# Altium PCB LED Oscilloscope.PcbDoc
Units mm, origin at the board's own origin, x right, y up, seen from the top; angles counter-clockwise.
Board outline 120 x 90 mm, 2 copper layers (Top Layer, Bottom Layer); 122 components, 33 nets, 286 pads, 0 vias.
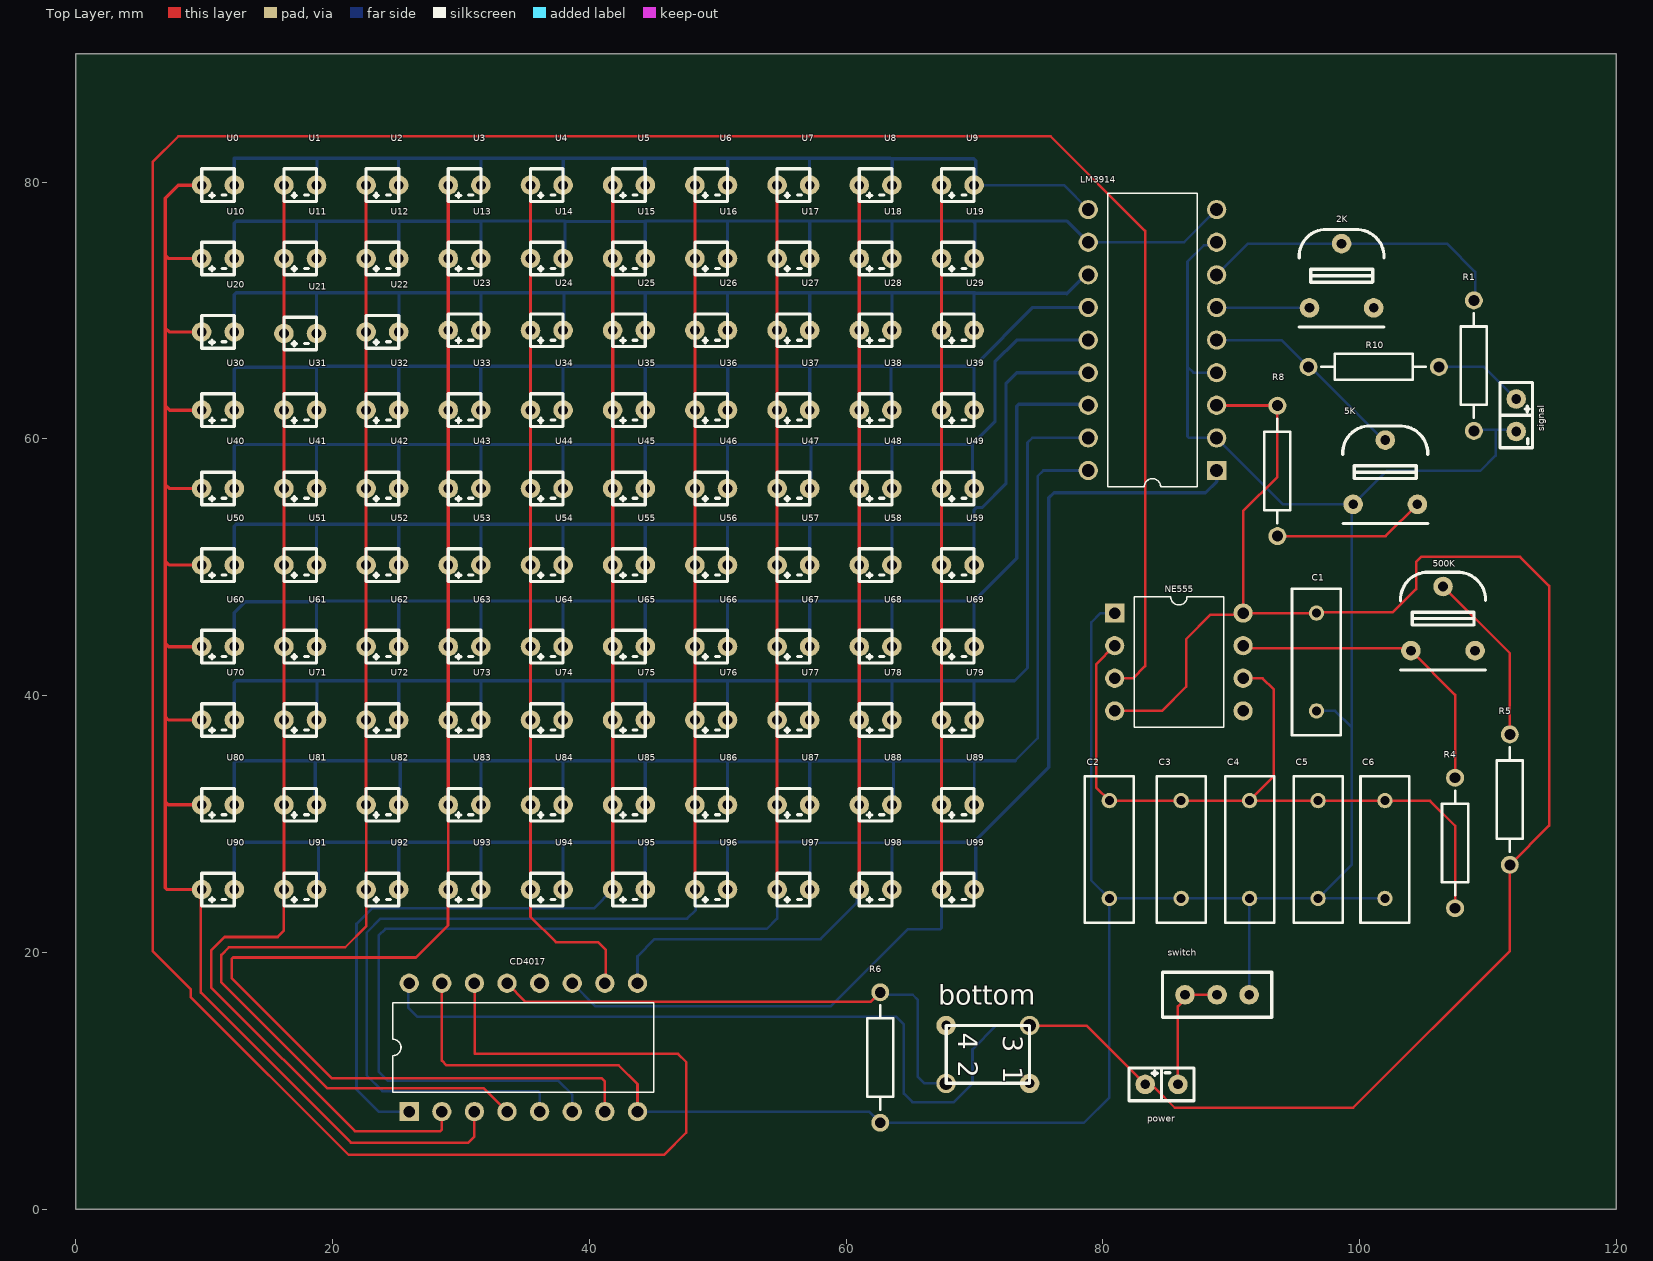
[diagram p0: Top Layer view]
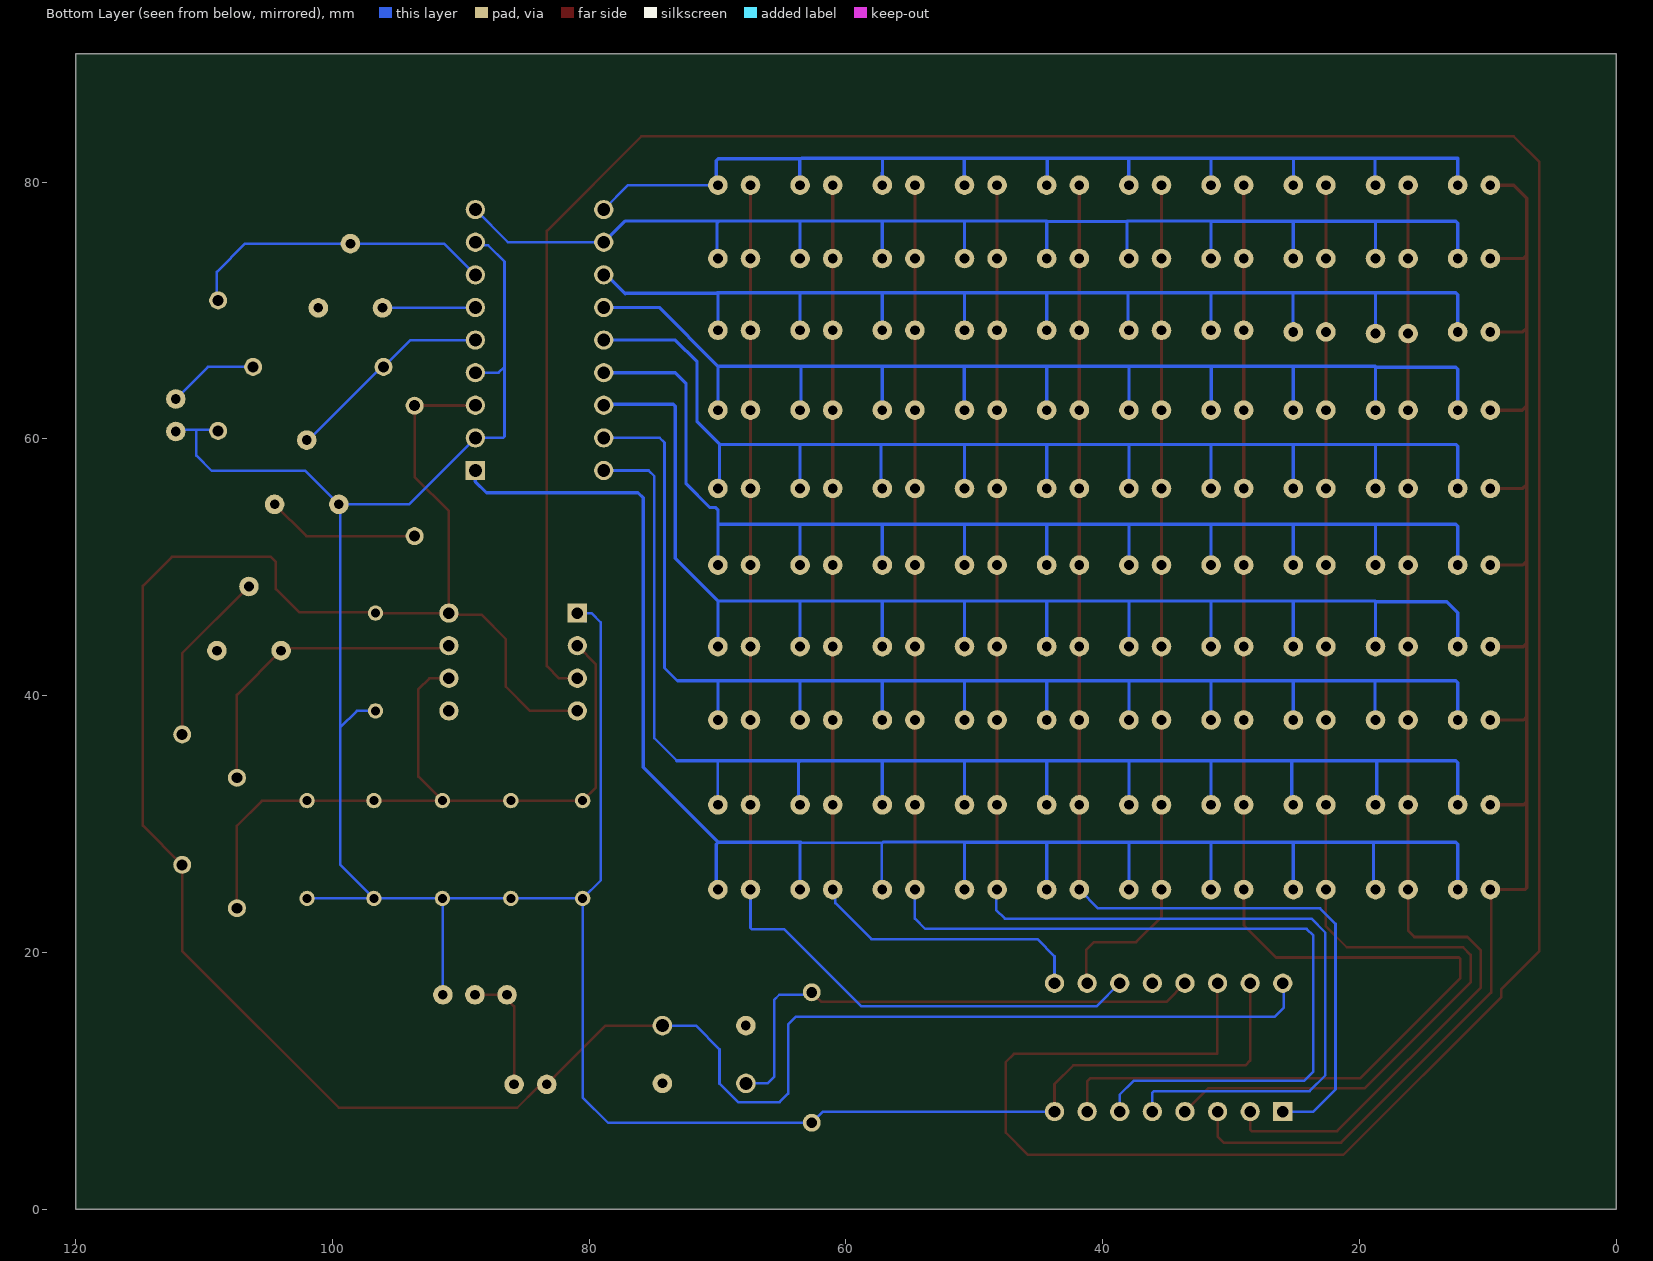
[diagram p1: Bottom Layer view, seen from below]

## Layer stack, top to bottom
Top Solder: solder mask 0.0102, Solder Resist, Dk 3.5
Top Layer: signal copper 0.0356
Dielectric 1: dielectric 0.32, FR-4, Dk 4.8
Bottom Layer: signal copper 0.0356
Bottom Solder: solder mask 0.0102, Solder Resist, Dk 3.5

## Board outline
0,0 0,90 120,90 120,0

## Design rules (kind name [scope] priority, off if disabled: settings)
Clearance [All] p1: gap=0.6 ignorepadtopadclearanceinfootprint=FALSE
PolygonConnect [All] p1: connectstyle=Direct reliefconductorwidth=0.254 reliefentries=4 polygonreliefangle="90 Angle" airgapwidth=0.254
RoomDefinition "LED Oscilloscope" [InComponentClass('LED Oscilloscope')] p1: confinementstyle=ConfineIn formatcopy=TRUE lockcomponents=FALSE outline -25.4,-25.4 25.4,-25.4 25.4,0 -25.4,0
RoutingVias [All] p1: holewidth=1 width=1.5 viastyle="Through Hole" minholewidth=1 minwidth=1.5 maxholewidth=1 maxwidth=1.5
SolderMaskExpansion [All] p1: expansion=0.102 istentingtop=FALSE
Width [All] p1: maxlimit=0.254 minlimit=0.2 preferedwidth=0.2
30 further rules are at their usual default settings.

## Components (designator, comment, footprint, x,y, rotation, side; value= is the part's Value field where it differs from the comment)
2K "RESADJ" RESADJ 96.1,70.2 r0 top
5K "RESADJ" RESADJ 99.5,54.9 r0 top
500K "RESADJ" RESADJ 104,43.5 r0 top
bottom "bottom" BOTTOM 74.3,14.3 r270 top
C1 "Cap" RAD-0.3 96.642,42.618 r90 top value=10nF
C2 "Cap" RAD-0.3 80.513,28.013 r90 top value=10nF
C3 "Cap" RAD-0.3 86.101,28.013 r90 top value=10nF
C4 "Cap" RAD-0.3 91.435,28.013 r90 top value=10nF
C5 "Cap" RAD-0.3 96.769,28.013 r90 top value=10nF
C6 "Cap" RAD-0.3 101.976,28.013 r90 top value=10nF
CD4017 "CD4017" CD4017 25.98,7.6 r90 top
LM3914 "LM3914" LM3914 88.867,57.531 r180 top
NE555 "NE555" "NE555 - DUPLICATE" 80.927,46.428 r0 top
power "power" POWER 83.307,9.725 r0 top
R1 "Res2" AXIAL-0.4 108.9,65.7 r270 top value=1K
R4 "Res2" AXIAL-0.4 107.437,28.521 r270 top value=1K
R5 "Res2" AXIAL-0.4 111.7,31.9 r90 top value=120R
R6 "Res2" AXIAL-0.4 62.667,11.811 r90 top value=10K
R8 "Res2" AXIAL-0.4 93.6,57.5 r270 top value=15K
R10 "Res2" AXIAL-0.4 101.1,65.6 r0 top value=10K
signal "signal" SIGNAL 112.2,60.57 r270 top
switch "switch" SWITCH 86.4,16.7 r0 top
U0 "diode" LED 12.357,79.756 r0 top
U1 "diode" LED 18.759,79.756 r0 top
U2 "diode" LED 25.162,79.756 r0 top
U3 "diode" LED 31.564,79.756 r0 top
U4 "diode" LED 37.966,79.756 r0 top
U5 "diode" LED 44.368,79.756 r0 top
U6 "diode" LED 50.77,79.756 r0 top
U7 "diode" LED 57.173,79.756 r0 top
U8 "diode" LED 63.575,79.756 r0 top
U9 "diode" LED 69.977,79.756 r0 top
U10 "diode" LED 12.357,74.041 r0 top
U11 "diode" LED 18.759,74.041 r0 top
U12 "diode" LED 25.162,74.041 r0 top
U13 "diode" LED 31.564,74.041 r0 top
U14 "diode" LED 37.966,74.041 r0 top
U15 "diode" LED 44.368,74.041 r0 top
U16 "diode" LED 50.77,74.041 r0 top
U17 "diode" LED 57.173,74.041 r0 top
U18 "diode" LED 63.575,74.041 r0 top
U19 "diode" LED 69.977,74.041 r0 top
U20 "diode" LED 12.357,68.326 r0 top
U21 "diode" LED 18.759,68.199 r0 top
U22 "diode" LED 25.162,68.326 r0 top
U23 "diode" LED 31.564,68.453 r0 top
U24 "diode" LED 37.966,68.453 r0 top
U25 "diode" LED 44.368,68.453 r0 top
U26 "diode" LED 50.77,68.453 r0 top
U27 "diode" LED 57.173,68.453 r0 top
U28 "diode" LED 63.575,68.453 r0 top
U29 "diode" LED 69.977,68.453 r0 top
U30 "diode" LED 12.357,62.23 r0 top
U31 "diode" LED 18.759,62.23 r0 top
U32 "diode" LED 25.162,62.23 r0 top
U33 "diode" LED 31.564,62.23 r0 top
U34 "diode" LED 37.966,62.23 r0 top
U35 "diode" LED 44.368,62.23 r0 top
U36 "diode" LED 50.77,62.23 r0 top
U37 "diode" LED 57.173,62.23 r0 top
U38 "diode" LED 63.575,62.23 r0 top
U39 "diode" LED 69.977,62.23 r0 top
U40 "diode" LED 12.357,56.134 r0 top
U41 "diode" LED 18.759,56.134 r0 top
U42 "diode" LED 25.162,56.134 r0 top
U43 "diode" LED 31.564,56.134 r0 top
U44 "diode" LED 37.966,56.134 r0 top
U45 "diode" LED 44.368,56.134 r0 top
U46 "diode" LED 50.77,56.134 r0 top
U47 "diode" LED 57.173,56.134 r0 top
U48 "diode" LED 63.575,56.134 r0 top
U49 "diode" LED 69.977,56.134 r0 top
U50 "diode" LED 12.357,50.165 r0 top
U51 "diode" LED 18.759,50.165 r0 top
U52 "diode" LED 25.162,50.165 r0 top
U53 "diode" LED 31.564,50.165 r0 top
U54 "diode" LED 37.966,50.165 r0 top
U55 "diode" LED 44.368,50.165 r0 top
U56 "diode" LED 50.77,50.165 r0 top
U57 "diode" LED 57.173,50.165 r0 top
U58 "diode" LED 63.575,50.165 r0 top
U59 "diode" LED 69.977,50.165 r0 top
U60 "diode" LED 12.357,43.815 r0 top
U61 "diode" LED 18.759,43.815 r0 top
U62 "diode" LED 25.162,43.815 r0 top
U63 "diode" LED 31.564,43.815 r0 top
U64 "diode" LED 37.966,43.815 r0 top
U65 "diode" LED 44.368,43.815 r0 top
U66 "diode" LED 50.77,43.815 r0 top
U67 "diode" LED 57.173,43.815 r0 top
U68 "diode" LED 63.575,43.815 r0 top
U69 "diode" LED 69.977,43.815 r0 top
U70 "diode" LED 12.357,38.1 r0 top
U71 "diode" LED 18.759,38.1 r0 top
U72 "diode" LED 25.162,38.1 r0 top
U73 "diode" LED 31.564,38.1 r0 top
U74 "diode" LED 37.966,38.1 r0 top
U75 "diode" LED 44.368,38.1 r0 top
U76 "diode" LED 50.77,38.1 r0 top
U77 "diode" LED 57.173,38.1 r0 top
U78 "diode" LED 63.575,38.1 r0 top
U79 "diode" LED 69.977,38.1 r0 top
U80 "diode" LED 12.357,31.496 r0 top
U81 "diode" LED 18.759,31.496 r0 top
U82 "diode" LED 25.162,31.496 r0 top
U83 "diode" LED 31.564,31.496 r0 top
U84 "diode" LED 37.966,31.496 r0 top
U85 "diode" LED 44.368,31.496 r0 top
U86 "diode" LED 50.77,31.496 r0 top
U87 "diode" LED 57.173,31.496 r0 top
U88 "diode" LED 63.575,31.496 r0 top
U89 "diode" LED 69.977,31.496 r0 top
U90 "diode" LED 12.357,24.892 r0 top
U91 "diode" LED 18.759,24.892 r0 top
U92 "diode" LED 25.162,24.892 r0 top
U93 "diode" LED 31.564,24.892 r0 top
U94 "diode" LED 37.966,24.892 r0 top
U95 "diode" LED 44.368,24.892 r0 top
U96 "diode" LED 50.77,24.892 r0 top
U97 "diode" LED 57.173,24.892 r0 top
U98 "diode" LED 63.575,24.892 r0 top
U99 "diode" LED 69.977,24.892 r0 top

## Footprints (in the part's own frame and the unit in brackets; to place one, negate y for a bottom-side part, rotate by r counter-clockwise, add the part's x,y. Pads: shape width x height; smd on the part's side, far side on the other; paste and mask are expansions set on the pad)
AXIAL-0.4 [mm] "Axial Device, Thru-Hole; 2 Leads; 0.4 in Pin Spacing"
  round 1.4 hole 0.85: 1(-5.08,0) 2(5.08,0)
  silkscreen extent -4.06,-1.02 4.06,1.02
BOTTOM [mil]
  round 60 hole 39.37: 1(0,0) 2(177.17,-255.9)
  round 60 hole 30: 28(177.17,0) 29(0,-255.9)
  silkscreen extent 0,-256 177,0
CD4017 [mm]
  rect 1.5x1.5 hole 0.9: 1(0,0)
  round 1.5 hole 0.9: 2(0,-2.54) 3(0,-5.08) 4(0,-7.62) 5(0,-10.16) 6(0,-12.7) 7(0,-15.24) 8(0,-17.78) 9(10,-17.78) 10(10,-15.24) 11(10,-12.7) 12(10,-10.16) 13(10,-7.62) 14(10,-5.08) 15(10,-2.54) 16(10,0)
  silkscreen extent 1.51,-19.05 8.49,1.27
LED [mil]
  round 60 hole 30: 0(-100,0) 1(0,0)
  silkscreen extent -100,-50 0,50
LM3914 [mm]
  rect 1.5x1.5 hole 1: 1(0,0)
  round 1.5 hole 1: 2(0,-2.54) 3(0,-5.08) 4(0,-7.62) 5(0,-10.16) 6(0,-12.7) 7(0,-15.24) 8(0,-17.78) 9(0,-20.32) 10(10,-20.32) 11(10,-17.78) 12(10,-15.24) 13(10,-12.7) 14(10,-10.16) 15(10,-7.62) 16(10,-5.08) 17(10,-2.54) 18(10,0)
  silkscreen extent 1.51,-21.59 8.49,1.27
"NE555 - DUPLICATE" [mm]
  rect 1.5x1.5 hole 0.9: 1(0,0)
  round 1.5 hole 0.9: 2(0,-2.54) 3(0,-5.08) 4(0,-7.62) 5(10,-7.62) 6(10,-5.08) 7(10,-2.54) 8(10,0)
  silkscreen extent 1.51,-8.89 8.49,1.27
POWER [mil]
  round 60 hole 30: 8(0,0) 9(100,0)
  silkscreen extent -50,-50 150,50
RAD-0.3 [mm] "Radial Cap, Thru-Hole; 2 Leads; 0.3 in Pin Spacing"
  round 1.2 hole 0.7: 1(-3.81,0) 2(3.81,0)
  silkscreen extent -5.71,-1.91 5.71,1.9
RESADJ [mil]
  round 60 hole 30: 1(0,0) 2(196.85,0) 3(98.43,196.85)
  silkscreen extent -32,-59 229,240
SIGNAL [mil]
  round 60 hole 30: 6(0,0) 7(-99.61,0)
  silkscreen extent -150,-50 50,50
SWITCH [mil]
  round 60 hole 30: 10(0,0) 11(98.43,0) 12(196.85,0)
  silkscreen extent -69,-69 266,69

## Part data
C1 C2 C3 C4 C5 C6: "Capacitor", LatestRevisionDate=17-Jul-2002, LatestRevisionNote="Re-released for DXP Platform.", PackageDescription="Radial Cap, Thru-Hole; 2 Leads; 0.3 in Pin Spacing", PackageReference=RAD-0.3, Published=8-Jun-2000, Publisher="Altium Limited"
R1 R4 R5 R6 R8 R10: "Resistor", LatestRevisionDate=17-Jul-2002, LatestRevisionNote="Re-released for DXP Platform.", PackageDescription="Axial Device, Thru-Hole; 2 Leads; 0.4 in Pin Spacing", PackageReference=AXIAL-0.4, Published=8-Jun-2000, Publisher="Altium Limited"
U0 U1 U2 U3 U4 U5 U6 U7 U8 U9 U10 U11 U12 U13 U14 U15 U16 U17 U18 U19 U20 U21 U22 U23 U24 U25 U26 U27 U28 U29 U30 U31 U32 U33 U34 U35 U36 U37 U38 U39 U40 U41 U42 U43 U44 U45 U46 U47 U48 U49 U50 U51 U52 U53 U54 U55 U56 U57 U58 U59 U60 U61 U62 U63 U64 U65 U66 U67 U68 U69 U70 U71 U72 U73 U74 U75 U76 U77 U78 U79 U80 U81 U82 U83 U84 U85 U86 U87 U88 U89 U90 U91 U92 U93 U94 U95 U96 U97 U98 U99: "own use"

## Nets (pads, with @x,y where several pads share a name; then routed paths per layer and width w, separated by ;. In a path a pad name is that pad's centre, name@x,y a point inside that pad or via, vN(x,y) a via of type N, cw(c..) or ccw(c..) an arc to the next point about the centre after c; other vN are vias at no path point)
GND: 5K.1 C1.1 C2.1 C3.1 C4.1 C5.1 C6.1 CD4017.8 CD4017.15 LM3914.2 LM3914.4 LM3914.8 NE555.1 R1.2 R6.1 signal.6 switch.12 | length 219.2
  Top Layer w0.2: CD4017.15 28.52,11.58 28.9,11.2 42.3,11.2 43.76,9.74 CD4017.8 CD4017.8@43.65,7.71 ; C2.1 C2.1@80.6,24.116
  Bottom Layer w0.2: CD4017.8 61.798,7.6 R6.1 78.531,6.731 80.513,8.713 C2.1 ; NE555.1@80.277,45.778 NE555.1 79.828,46.428 79.1,45.7 79.1,25.616 C2.1 ; LM3914.4 87.049,65.151 86.6,65.6 ; LM3914.8 88.618,75.062 87.862,75.062 86.6,73.8 86.6,65.6 ; switch.12 91.418,16.717 91.418,24.185 C4.1 ; C1.1 98.092,38.808 99.4,37.5 ; C6.1 C5.1 ; R1.2 108.98,60.7 110.6,60.7 ; signal.6 112.07,60.7 110.6,60.7 ; C2.1 C3.1 C4.1 ; 86.6,65.6 86.6,60.188 86.717,60.071 LM3914.2 94.038,54.9 99.4,54.9 5K.1 ; C4.1 C5.1 ; C5.1 99.4,26.834 99.4,37.5 ; 99.4,37.5 99.4,54.8 5K.1 ; 5K.1 102.1,57.5 109.4,57.5 110.6,58.7 110.6,60.7
Net2K_1: 2K.1 LM3914.6 | length 7.2
  Bottom Layer w0.2: LM3914.6 88.882,70.216 96.084,70.216 2K.1
Net2K_3: 2K.3 LM3914.7 R1.1 | length 24.3
  Bottom Layer w0.2: LM3914.7 91.296,75.2 2K.3 106.8,75.2 109,73 109,70.88 R1.1
Net5K_2: 5K.2 R8.2 | length 11.9
  Top Layer w0.2: R8.2 102.02,52.42 5K.2
Net5K_3: 5K.3 LM3914.5 R10.1 | length 16.4
  Bottom Layer w0.2: LM3914.5 93.929,67.691 R10.1 96.16,65.6 101.86,59.9 5K.3
Net500K_1: 500K.1 NE555.7 R4.1 | length 24.6
  Top Layer w0.2: NE555.7 91.121,43.694 103.806,43.694 500K.1 107.437,40.063 R4.1
Net500K_3: 500K.3 R5.2 | length 13.7
  Top Layer w0.2: 500K.3 111.7,43.3 R5.2
Netbottom_2: bottom.2 CD4017.13 R6.2 | length 41.8
  Top Layer w0.2: CD4017.13 35.05,16.15 61.926,16.15 R6.2 ; bottom.2@67.638,9.962 bottom.2
  Bottom Layer w0.2: R6.2 62.858,16.7 65.2,16.7 65.6,16.3 65.6,10.3 66.1,9.8 bottom.2
  Bottom Layer w0.254: R6.2 R6.2@62.709,16.891
NetC2_2: C2.2 C3.2 C4.2 C5.2 C6.2 NE555.2 NE555.6 R4.2 | length 59.4
  Top Layer w0.2: NE555.2 79.477,42.438 79.477,32.859 C2.2 C3.2 C4.2 ; NE555.6 92.452,41.348 93.3,40.5 93.3,33.688 C4.2 ; R4.2 107.437,29.863 105.5,31.8 101.999,31.8 C6.2 C5.2 C4.2
NetCD4017_1: CD4017.1 U5.0 U15.0 U25.0 U35.0 U45.0 U55.0 U65.0 U75.0 U85.0 U95.0 | length 93.7
  Top Layer w0.254: U95.0 U85.0 U65.0 U45.0 U25.0 U5.0
  Bottom Layer w0.2: CD4017.1 24.482,7.6 24.465,7.583 23.617,7.583 21.873,9.327 21.873,22.227 23.076,23.43 40.366,23.43 U95.0
NetCD4017_2: CD4017.2 U1.0 U11.0 U21.0 U31.0 U41.0 U51.0 U61.0 U71.0 U81.0 U91.0 | length 91.3
  Top Layer w0.2: U91.0 16.219,21.693 15.726,21.2 11.611,21.2 10.557,20.146 10.557,17.274 21.748,6.082 28.403,6.082 28.52,6.199 CD4017.2
  Top Layer w0.254: U91.0 U81.0 U71.0 U61.0 U51.0 U41.0 U31.0 U21.0 U11.0 U1.0
NetCD4017_3: CD4017.3 U0.0 U10.0 U20.0 U30.0 U40.0 U50.0 U60.0 U70.0 U80.0 U90.0 | length 119.8
  Top Layer w0.2: U90.0 9.757,24.832 9.757,16.874 21.448,5.183 30.583,5.183 31.06,5.66 CD4017.3
  Top Layer w0.254: U90.0 7.134,24.892 6.985,25.041 6.985,31.73 ; U80.0 7.219,31.496 6.985,31.73 ; U70.0 7.226,38.1 6.985,38.341 ; U60.0 7.249,43.815 6.985,44.079 ; U50.0 7.303,50.165 6.985,50.483 ; U40.0 7.28,56.134 6.985,56.429 ; U30.0 7.338,62.23 6.985,62.583 ; U20.0 7.278,68.326 6.985,68.619 ; U10.0 7.239,74.041 6.985,74.295 ; U0.0 8.001,79.756 6.985,78.74 6.985,74.295 ; 6.985,31.73 6.985,38.341 ; 6.985,38.341 6.985,44.079 ; 6.985,44.079 6.985,50.483 ; 6.985,50.483 6.985,56.429 ; 6.985,56.429 6.985,62.583 ; 6.985,62.583 6.985,68.619 ; 6.985,68.619 6.985,74.295
NetCD4017_4: CD4017.4 U2.0 U12.0 U22.0 U32.0 U42.0 U52.0 U62.0 U72.0 U82.0 U92.0 | length 98.5
  Top Layer w0.2: U82.0 U92.0 22.622,22.022 21,20.4 11.943,20.4 11.357,19.814 11.357,17.66 19.612,9.404 31.796,9.404 CD4017.4
  Top Layer w0.254: U82.0 U72.0 U62.0 U52.0 U42.0 U32.0 U22.0 U12.0 U2.0
NetCD4017_5: CD4017.5 U6.0 U16.0 U26.0 U36.0 U46.0 U56.0 U66.0 U76.0 U86.0 U96.0 | length 109.5
  Top Layer w0.254: U96.0 U86.0 U76.0 U56.0 U36.0 U16.0 U6.0
  Bottom Layer w0.2: CD4017.5 36.14,9.083 36.023,9.2 23.9,9.2 22.673,10.427 22.673,21.543 23.757,22.627 47.627,22.627 48.3,23.3 48.3,24.822 U96.0
NetCD4017_6: CD4017.6 U7.0 U17.0 U27.0 U37.0 U47.0 U57.0 U67.0 U77.0 U87.0 U97.0 | length 116.4
  Top Layer w0.254: U97.0 U87.0 U77.0 U67.0 U57.0 U47.0 U37.0 U27.0 U17.0 U7.0
  Bottom Layer w0.2: CD4017.6 38.68,8.92 37.6,10 24.317,10 23.6,10.717 23.6,21.3 24.127,21.827 53.827,21.827 54.633,22.633 U97.0
NetCD4017_7: CD4017.7 U3.0 U13.0 U23.0 U33.0 U43.0 U53.0 U63.0 U73.0 U83.0 U93.0 | length 111.8
  Top Layer w0.2: U83.0 U93.0 29,24.868 29,22.1 26.5,19.6 12.274,19.6 12.157,19.483 12.157,17.991 19.944,10.204 40.964,10.204 41.22,9.949 CD4017.7
  Top Layer w0.254: U83.0 U73.0 U63.0 U53.0 U43.0 U33.0 U23.0 U13.0 U3.0
NetCD4017_9: CD4017.9 U8.0 U18.0 U28.0 U38.0 U48.0 U58.0 U68.0 U78.0 U88.0 U98.0 | length 77.1
  Top Layer w0.254: U8.0 U28.0 U48.0 U68.0 U88.0 U98.0 U98.0@61.214,24.713
  Bottom Layer w0.2: CD4017.9 43.76,19.687 45.1,21.027 58.027,21.027 60.83,23.83 60.83,24.687 U98.0
NetCD4017_10: CD4017.10 U4.0 U14.0 U24.0 U34.0 U44.0 U54.0 U64.0 U74.0 U84.0 U94.0 | length 65.7
  Top Layer w0.2: U94.0 35.426,22.774 37.4,20.8 40.7,20.8 41.3,20.2 41.3,17.68 CD4017.10 ; 35.426,25.719 U84.0 U74.0
  Top Layer w0.254: U74.0 U64.0 U54.0 U34.0 U14.0 U4.0
NetCD4017_11: CD4017.11 U9.0 U19.0 U29.0 U39.0 U49.0 U59.0 U69.0 U79.0 U89.0 U99.0 | length 89.9
  Top Layer w0.254: U99.0 U89.0 U79.0 U59.0 U39.0 U19.0 U9.0
  Bottom Layer w0.2: CD4017.11 40.48,15.8 58.8,15.8 64.8,21.8 67.32,21.8 67.437,21.917 U99.0@67.437,24.765
  Bottom Layer w0.254: U99.0 U99.0@67.564,24.765
NetCD4017_14: CD4017.14 NE555.3 | length 256.3
  Top Layer w0.2: CD4017.14 31.1,17.56 31.1,12.1 46.916,12.1 47.556,11.459 47.556,5.956 45.828,4.228 21.271,4.228 8.957,16.542 8.957,17.143 6,20.1 6,81.565 8.001,83.566 75.934,83.566 83.3,76.2 83.3,42.3 82.348,41.348 NE555.3
NetLM3914_1: LM3914.1 U90.1 U91.1 U92.1 U93.1 U94.1 U95.1 U96.1 U97.1 U98.1 U99.1 | length 138.2
  Bottom Layer w0.2: 50.8,28.575 50.825,28.6 57.083,28.6 57.137,28.545 ; U97.1 57.2,24.919 57.2,28.483 57.137,28.545 ; 63.5,28.575 63.47,28.545 57.137,28.545
  Bottom Layer w0.254: U90.1 12.357,28.426 12.506,28.575 18.923,28.575 ; U91.1 18.923,25.056 18.923,28.575 ; U92.1 25.162,28.559 25.146,28.575 ; U93.1 31.564,28.507 ; U94.1 37.966,28.568 37.973,28.575 ; U95.1 44.368,28.53 ; U96.1 50.77,28.545 ; 50.8,28.575 44.368,28.575 37.973,28.575 ; U98.1 63.575,28.5 63.5,28.575 69.951,28.575 ; U99.1 70.1,25.015 70.1,28.426 69.951,28.575 ; LM3914.1 88.867,56.667 88,55.8 76.2,55.8 75.8,55.4 75.8,34.424 69.951,28.575 ; 18.923,28.575 25.146,28.575 ; 25.146,28.575 31.564,28.575 37.973,28.575
NetLM3914_9: LM3914.9 LM3914.11 U10.1 U11.1 U12.1 U13.1 U14.1 U15.1 U16.1 U17.1 U18.1 U19.1 | length 107.3
  Top Layer w0.254: LM3914.9 LM3914.9@88.9,77.884
  Bottom Layer w0.2: LM3914.11 86.327,75.311 LM3914.9
  Bottom Layer w0.254: U10.1 12.357,76.794 12.506,76.943 18.759,76.943 ; U11.1 18.759,76.943 ; U12.1 25.162,76.943 ; U13.1 31.564,76.943 ; U14.1 38.105,74.18 38.105,76.927 44.368,76.927 ; 38.105,76.962 31.564,76.962 31.564,76.943 ; U15.1 44.368,76.917 ; 44.368,76.962 69.892,76.962 ; U16.1 50.77,76.932 ; U17.1 57.173,76.939 ; U18.1 63.575,76.91 ; U19.1 70.04,74.105 70.04,76.813 69.892,76.962 ; LM3914.11 77.216,76.962 69.892,76.962 ; 18.759,76.943 25.162,76.943 ; 25.162,76.943 31.564,76.943
NetLM3914_10: LM3914.10 U0.1 U1.1 U2.1 U3.1 U4.1 U5.1 U6.1 U7.1 U8.1 U9.1 | length 88.3
  Bottom Layer w0.2: U9.1 76.962,79.756 LM3914.10
  Bottom Layer w0.254: U0.1 12.357,81.859 18.796,81.859 ; U1.1 18.796,79.756 18.796,81.859 ; U2.1 25.146,79.772 25.146,81.859 ; U3.1 31.564,81.859 ; U4.1 37.973,79.763 37.973,81.859 ; U5.1 44.323,79.711 44.323,81.859 ; U6.1 50.8,79.786 50.8,81.859 ; U7.1 57.151,81.859 ; 63.451,81.859 57.151,81.859 ; 63.502,81.808 69.951,81.808 70.1,81.659 70.1,79.879 U9.1 ; U8.1 63.6,79.781 63.6,81.71 ; 18.796,81.859 25.146,81.859 ; 25.146,81.859 31.564,81.859 ; 31.564,81.859 37.973,81.859 ; 37.973,81.859 44.323,81.859 ; 44.323,81.859 50.8,81.859 ; 50.8,81.859 57.151,81.859
NetLM3914_12: LM3914.12 U20.1 U21.1 U22.1 U23.1 U24.1 U25.1 U26.1 U27.1 U28.1 U29.1 | length 96.8
  Bottom Layer w0.254: U20.1 12.357,71.225 12.506,71.374 18.759,71.374 ; U21.1 18.759,71.374 ; U22.1 25.177,68.341 25.177,71.374 ; U23.1 31.564,71.374 ; U24.1 38.037,68.524 38.037,71.374 ; U25.1 44.368,71.374 ; U26.1 50.77,71.374 ; U27.1 57.168,68.458 57.168,71.374 ; U28.1 63.575,71.374 ; U29.1 69.977,71.374 63.575,71.374 ; 70.029,71.374 69.988,71.332 77.168,71.332 77.193,71.307 78.657,72.771 LM3914.12 ; 18.759,71.374 25.177,71.374 ; 25.177,71.374 31.564,71.374 ; 31.564,71.374 38.037,71.374 ; 38.037,71.374 44.368,71.374 ; 44.368,71.374 50.77,71.374 ; 50.77,71.374 57.168,71.374 ; 57.168,71.374 63.575,71.374
NetLM3914_13: LM3914.13 U30.1 U31.1 U32.1 U33.1 U34.1 U35.1 U36.1 U37.1 U38.1 U39.1 | length 102.3
  Bottom Layer w0.254: U30.1 12.357,65.429 12.506,65.578 18.759,65.578 ; U31.1 18.759,65.659 25.162,65.659 ; U32.1 25.162,65.659 ; U33.1@31.437,62.357 31.555,62.475 31.555,65.659 ; U34.1 37.966,65.652 ; U35.1 44.368,65.614 ; U36.1@50.8,62.26 50.8,65.659 ; U37.1 57.173,65.636 ; U38.1@63.702,62.357 63.5,62.559 63.5,65.659 ; U39.1 69.977,65.659 ; LM3914.13 74.549,70.231 69.977,65.659 ; 25.162,65.659 31.555,65.659 ; 31.555,65.659 50.8,65.659 ; 50.8,65.659 63.5,65.659 ; 63.5,65.659 69.977,65.659
NetLM3914_14: LM3914.14 U40.1 U41.1 U42.1 U43.1 U44.1 U45.1 U46.1 U47.1 U48.1 U49.1 | length 106.7
  Bottom Layer w0.254: U40.1 12.357,59.414 12.506,59.563 31.623,59.563 ; U41.1 18.759,59.526 ; U42.1 25.162,59.547 ; U43.1 31.564,59.504 31.623,59.563 ; U44.1 37.966,59.556 ; U45.1 44.368,59.518 44.323,59.563 ; U46.1 50.77,59.563 ; U47.1@57.3,56.261 57.277,56.284 57.277,59.563 ; U48.1 63.575,59.511 63.627,59.563 ; U49.1@70.104,56.261 69.85,56.515 69.85,59.563 ; LM3914.14 73.291,67.691 71.6,66 71.6,61.313 69.85,59.563 ; 31.623,59.563 44.323,59.563 ; 44.323,59.563 50.77,59.563 ; 50.77,59.563 57.277,59.563 ; 57.277,59.563 63.627,59.563 ; 63.627,59.563 69.85,59.563
NetLM3914_15: LM3914.15 U50.1 U51.1 U52.1 U53.1 U54.1 U55.1 U56.1 U57.1 U58.1 U59.1 | length 108.1
  Bottom Layer w0.254: U50.1 12.357,53.191 12.506,53.34 25.146,53.34 ; U51.1 18.759,53.303 ; U52.1 25.162,53.324 25.146,53.34 ; U53.1 31.564,53.272 ; U54.1 37.966,53.333 ; U55.1 44.368,53.295 ; U56.1 50.77,53.31 50.8,53.34 ; U57.1 57.173,53.317 ; U58.1 63.575,53.34 ; U59.1 69.977,53.34 ; LM3914.15 73.305,65.151 72.454,64.3 72.454,56.505 70.594,54.645 70.138,54.645 69.977,54.484 69.977,53.34 ; 25.146,53.34 50.8,53.34 ; 50.8,53.34 63.575,53.34 ; 63.575,53.34 69.977,53.34
NetLM3914_16: LM3914.16 U60.1 U61.1 U62.1 U63.1 U64.1 U65.1 U66.1 U67.1 U68.1 U69.1 | length 114.3
  Bottom Layer w0.254: U60.1 12.357,46.459 13.203,47.305 18.759,47.305 ; U61.1 18.759,47.281 ; 18.759,47.371 63.627,47.371 ; U62.1 25.162,47.355 ; U63.1 31.564,47.312 ; U64.1 37.966,47.237 ; U65.1 44.368,47.199 ; U66.1 50.77,47.341 ; U67.1 57.173,47.348 ; U68.1 63.575,47.319 63.627,47.371 ; U69.1 69.977,47.371 ; LM3914.16 78.778,62.7 73.457,62.7 73.308,62.551 73.308,50.702 69.977,47.371 ; 63.627,47.371 69.977,47.371
NetLM3914_17: LM3914.17 U70.1 U71.1 U72.1 U73.1 U74.1 U75.1 U76.1 U77.1 U78.1 U79.1 | length 114.8
  Bottom Layer w0.2: 73.133,41.148 74.135,42.15 74.135,59.7 74.506,60.071 LM3914.17
  Bottom Layer w0.254: U70.1 12.357,40.999 12.506,41.148 18.796,41.148 ; U71.1@18.796,38.137 18.796,41.148 ; U72.1 25.162,41.037 25.273,41.148 31.564,41.148 ; 25.162,41.148 18.796,41.148 ; U73.1 31.564,41.148 ; U74.1 37.966,41.141 ; U75.1 44.368,41.103 44.323,41.148 ; U76.1 50.77,41.118 ; U77.1 57.173,41.125 ; U78.1 63.575,41.073 ; U79.1 69.977,41.148 ; 73.133,41.148 69.977,41.148 ; 31.564,41.148 44.323,41.148 ; 44.323,41.148 69.977,41.148
NetLM3914_18: LM3914.18 U80.1 U81.1 U82.1 U83.1 U84.1 U85.1 U86.1 U87.1 U88.1 U89.1 | length 121.9
  Bottom Layer w0.2: U89.1 70,31.519 70,34.925 ; 73.175,34.925 74.935,36.685 74.935,57.1 75.366,57.531 LM3914.18
  Bottom Layer w0.254: U80.1 12.357,34.776 12.506,34.925 18.669,34.925 ; U81.1 18.669,31.586 18.669,34.925 ; U82.1@25.273,31.607 25.273,34.925 ; U83.1 31.564,34.857 ; U84.1 37.966,34.918 37.973,34.925 ; U85.1 44.368,34.843 ; U86.1 50.77,34.895 50.8,34.925 ; U87.1 57.173,34.821 ; U88.1@63.582,31.503 63.568,31.503 63.7,31.635 63.7,34.776 63.551,34.925 ; 73.175,34.925 70,34.925 63.551,34.925 ; 18.669,34.925 25.273,34.925 ; 25.273,34.925 37.973,34.925 ; 37.973,34.925 50.8,34.925 ; 50.8,34.925 63.551,34.925
Netpower_9: power.9 switch.10 switch.11 | length 9.7
  Top Layer w0.2: power.9 85.847,15.789 86.4,16.342 switch.10 switch.11
NetR10_2: R10.2 signal.7 | length 7.1
  Bottom Layer w0.2: R10.2 109.7,65.6 signal.7
VCC: bottom.1 C1.2 CD4017.16 LM3914.3 NE555.4 NE555.8 power.8 R5.1 R8.1 | length 199.9
  Top Layer w0.2: bottom.1@74.1,14.3 bottom.1 78.732,14.3 82.741,10.291 ; NE555.4 84.608,38.808 86.5,40.7 86.5,44.4 88.4,46.3 90.799,46.3 NE555.8 ; power.8 83.56,9.472 84.033,9.472 85.604,7.9 99.5,7.9 111.7,20.1 R5.1 114.765,29.885 114.765,48.535 112.5,50.8 104.8,50.8 104.4,50.4 104.4,48.3 102.6,46.5 96.714,46.5 C1.2 NE555.8 ; LM3914.3 88.882,62.596 93.585,62.596 R8.1 93.6,57.043 90.927,54.37 NE555.8
  Bottom Layer w0.2: CD4017.16 25.9,17.52 25.9,15.7 26.6,15 63.9,15 64.5,14.4 64.5,9 65.162,8.338 68.406,8.338 69.853,9.785 69.853,12.453 71.7,14.3 bottom.1
pads on no net: 2K.2 500K.2 bottom.28 bottom.29 CD4017.12 NE555.5

## Silkscreen, mask and mechanical layers (free items; w line width, h text height)
Mechanical 1:
  the board outline again, w0.254

## Dimensions
0,90 to 0,0 on Mechanical 1
0,0 to 120,0 on Mechanical 1

## Text inside footprints (layer, text, board x,y; h text height)
bottom: Top Overlay "4" at 68.754,13.746 h1.52 r270; Top Overlay "2" at 68.754,11.546 h1.52 r270; Top Overlay "3" at 72.254,13.546 h1.52 r270; Top Overlay "1" at 72.254,11.146 h1.52 r270